# Altium PCB Модуль STM32F108СBT6.PcbDoc
Units mm, origin at the board's own origin, x right, y up, seen from the top; angles counter-clockwise.
Board outline 60 x 40 mm, 2 copper layers (Top Layer, Bottom Layer); 18 components, 43 nets, 182 pads, 31 vias.
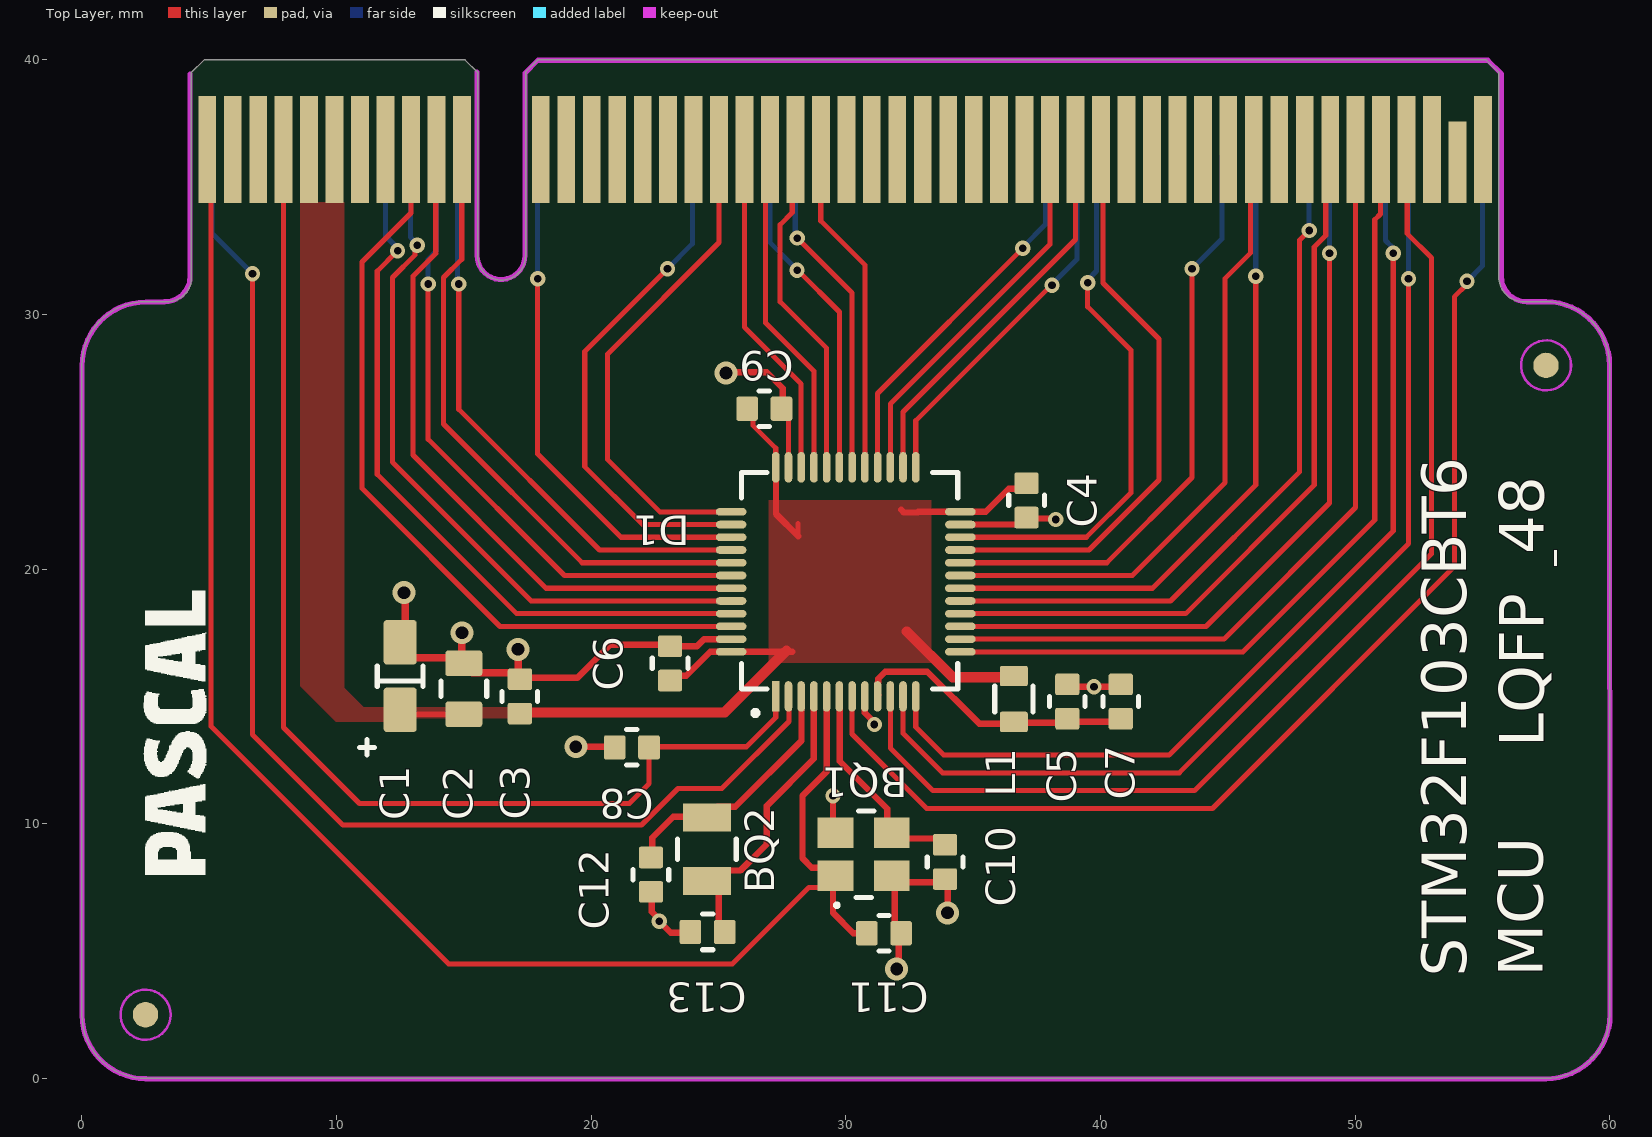
[diagram p0: Top Layer view]
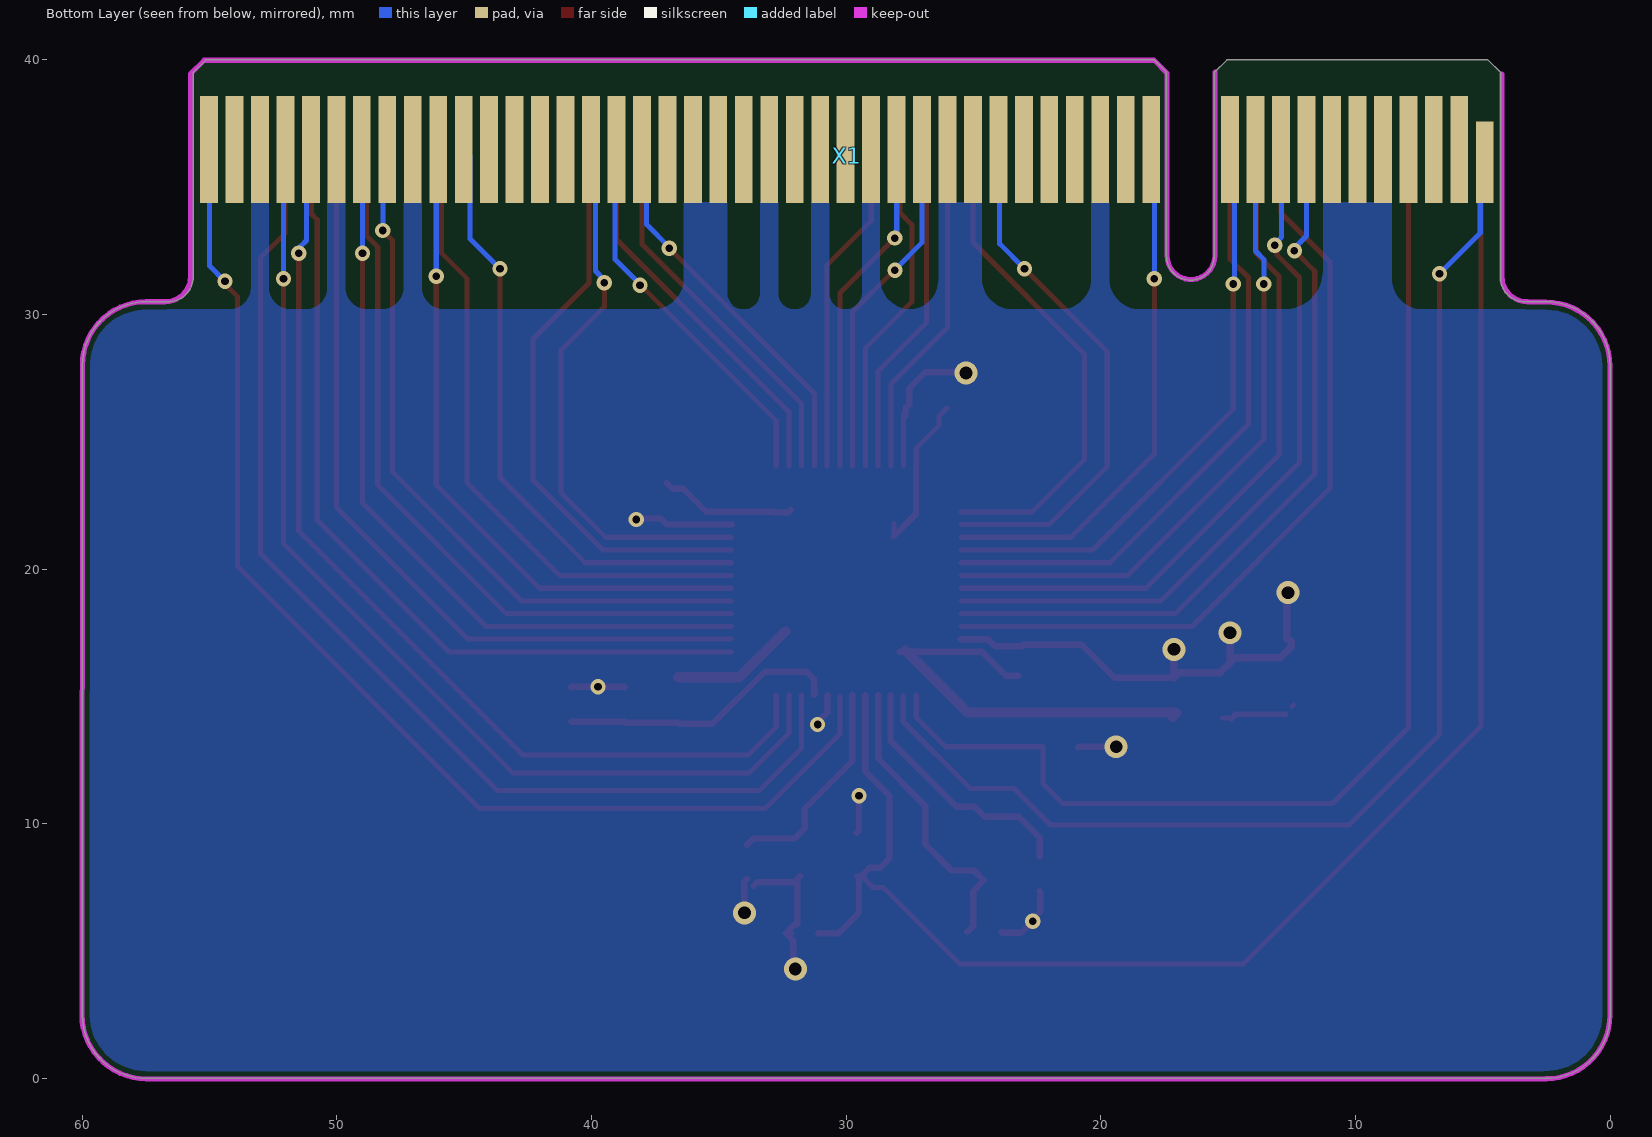
[diagram p1: Bottom Layer view, seen from below]
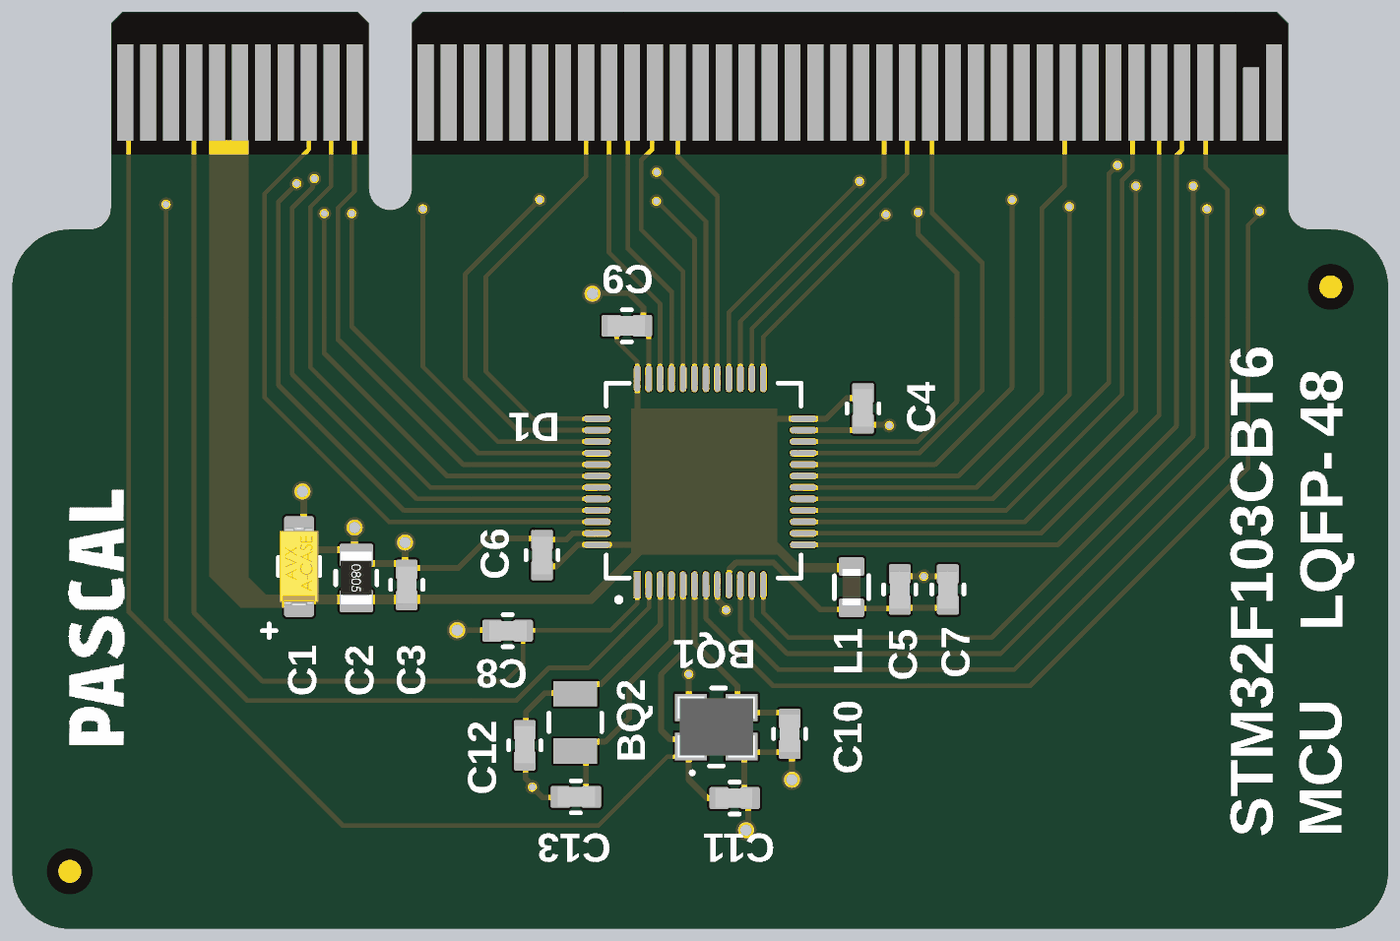
[diagram p2: 3D render of the assembled board from above, using the file's embedded part models]

## Layer stack, top to bottom
Top Solder: solder mask 0.0102, Solder Resist, Dk 3.5
Top Layer: signal copper 0.0356
Dielectric 1: dielectric 0.32, FR-4, Dk 4.8
Bottom Layer: signal copper 0.0356
Bottom Solder: solder mask 0.0102, Solder Resist, Dk 3.5

## Board outline
15.05,40 15.55,39.5 15.55,32.275 ccw(c16.475,32.275) 16.475,31.35 ccw(c16.475,32.3) 17.425,32.3 17.425,39.525 17.9,40 55.15,40 55.65,39.5 55.65,31.475 ccw(c56.625,31.475) 56.625,30.5 57.5,30.5 cw(c57.5,28) 60,28 60,2.5 cw(c57.5,2.5) 57.5,0 2.5,0 cw(c2.5,2.5) 0,2.5 0,28 cw(c2.5,28) 2.5,30.5 3.35,30.5 ccw(c3.35,31.45) 4.3,31.45 4.3,39.5 4.8,40

## Design rules (kind name [scope] priority, off if disabled: settings)
BoardOutlineClearance [All] p1: gap=0.25 ignorepadtopadclearanceinfootprint=FALSE
Clearance [All] p1: gap=0.2 ignorepadtopadclearanceinfootprint=FALSE
ComponentClearance [All] p1 off: gap=0.254 collisioncheckmode=3 verticalgap=0.254 showdistances=FALSE
Height [All] p1 off: minheight=0 maxheight=25.4 prefheight=12.7
PolygonConnect [All] p1: connectstyle=Direct reliefconductorwidth=0.254 reliefentries=4 polygonreliefangle="90 Angle" airgapwidth=0.254
RoutingVias [All] p1: holewidth=0.5 width=0.9 viastyle="Through Hole" minholewidth=0.3 minwidth=0.6 maxholewidth=0.711 maxwidth=1.27
SolderMaskExpansion [All] p1: expansion=-0.8 istentingtop=FALSE soldermaskfromhole=TRUE
Width [All] p1: maxlimit=0.5 minlimit=0.2 preferedwidth=0.25 minimp=50.000000 maximp=50.000000 favimp=50.000000
28 further rules are at their usual default settings.

## Components (designator, comment, footprint, x,y, rotation, side; value= is the part's Value field where it differs from the comment)
BQ1 "кварцевый резонатор_1" SMD3225_4P20MHZ20PF10PPM 30.7,8.8 r0 top value="8 МГц"
BQ2 "3215" SMD3215_2P32768KHZ125PF10PPM 24.55,9 r270 top value="32,768 кГц"
C1 "A-case" K53-68_3216(A) 12.5,15.8 r90 top value="10 мк"
C2 "0805" K10-69B_2.0_1.25(0805) 15,15.3 r270 top value="1 мк"
C3 "0603" K10-79_1.6_0.8(0603) 17.2,15 r270 top value="0,1 мк"
C4 "0603" K10-79_1.6_0.8(0603) 37.1,22.7 r90 top value="0,01 мк"
C5 "0603" K10-79_1.6_0.8(0603) 38.7,14.8 r270 top value="0,1 мк"
C6 "0603" K10-79_1.6_0.8(0603) 23.1,16.3 r270 top value="0,01 мк"
C7 "0603" K10-79_1.6_0.8(0603) 40.8,14.8 r270 top value="0,01 мк"
C8 "0603" K10-79_1.6_0.8(0603) 21.6,13 r0 top value="0,01 мк"
C9 "0603" K10-79_1.6_0.8(0603) 26.8,26.3 r180 top value="0,01 мк"
C10 "0603" K10-79_1.6_0.8(0603) 33.9,8.5 r90 top value=30
C11 "0603" K10-79_1.6_0.8(0603) 31.5,5.7 r180 top value=30
C12 "0603" K10-79_1.6_0.8(0603) 22.35,8 r90 top value=15
C13 "0603" K10-79_1.6_0.8(0603) 24.575,5.75 r0 top value=15
D1 "(LQFP-48) Xilinx" LQFP48 30,19.5 r90 top value=STM32F103C8T6
L1 "0603" 742792651 36.6,14.9 r270 top value=TL160808
X1 "KONT_POLE_MEZ" 3113-112t_otv 31.024,35.975 r180 bottom

## Footprints (in the part's own frame and the unit in brackets; to place one, negate y for a bottom-side part, rotate by r counter-clockwise, add the part's x,y. Pads: shape width x height; smd on the part's side, far side on the other; paste and mask are expansions set on the pad)
3113-112t_otv [mm]
  rect 0.7x3.2 smd: A1(26.1,0)
  rect 0.7x4.2 smd: A2(25.1,0.5) A3(24.1,0.5) A4(23.1,0.5) A5(22.1,0.5) A6(21.1,0.5) A7(20.1,0.5) A8(19.1,0.5) A9(18.1,0.5) A10(17.1,0.5) A11(16.1,0.5) A12(13,0.5) A13(12,0.5) A14(11,0.5) A15(10,0.5) A16(9,0.5) A17(8,0.5) A18(7,0.5) A19(6,0.5) A20(5,0.5) A21(4,0.5) A22(3,0.5) A23(2,0.5) A24(1,0.5) A25(0,0.5) A26(-1,0.5) A27(-2,0.5) A28(-3,0.5) A29(-4,0.5) A30(-5,0.5) A31(-6,0.5) A32(-7,0.5) A33(-8,0.5) A34(-9,0.5) A35(-10,0.5) A36(-11,0.5) A37(-12,0.5) A38(-13,0.5) A39(-14,0.5) A40(-15,0.5) A41(-16,0.5) A42(-17,0.5) A43(-18,0.5) A44(-19,0.5) A45(-20,0.5) A46(-21,0.5) A47(-22,0.5) A48(-23,0.5) A49(-24,0.5)
  rect 0.7x4.2 smd far side: B1(26.1,0.5) B2(25.1,0.5) B3(24.1,0.5) B4(23.1,0.5) B5(22.1,0.5) B6(21.1,0.5) B7(20.1,0.5) B8(19.1,0.5) B9(18.1,0.5) B10(17.1,0.5) B11(16.1,0.5) B12(13,0.5) B13(12,0.5) B14(11,0.5) B15(10,0.5) B16(9,0.5) B17(8,0.5) B18(7,0.5) B19(6,0.5) B20(5,0.5) B21(4,0.5) B22(3,0.5) B23(2,0.5) B24(1,0.5) B25(0,0.5) B26(-1,0.5) B27(-2,0.5) B28(-3,0.5) B29(-4,0.5) B30(-5,0.5) B31(-6,0.5) B32(-7,0.5) B33(-8,0.5) B34(-9,0.5) B35(-10,0.5) B36(-11,0.5) B37(-12,0.5) B38(-13,0.5) B39(-14,0.5) B40(-15,0.5) B41(-16,0.5) B42(-17,0.5) B43(-18,0.5) B44(-19,0.5) B45(-20,0.5) B46(-21,0.5) B47(-22,0.5) B49(-24,0.5)
  rect 0.7x3.2 smd far side: B48(-23,0)
742792651 [mm]
  rrect20% 0.8x1.1 smd mask+0.1: 1(-0.9,0)
  rrect20% 0.8x1.1 smd mask+0.102: 2(0.9,0)
  silkscreen extent -0.5,-0.75 0.5,0.75, body extent -0.8,-0.4 0.8,0.4, height 0.78
K10-69B_2.0_1.25(0805) [mm]
  rrect20% 1x1.45 smd mask+0.1: 1(-1,0) 2(1,0)
  silkscreen extent -0.3,-0.9 0.3,0.9, body extent -1.15,-0.67 1.15,0.68, height 0.76
K10-79_1.6_0.8(0603) [mm]
  rrect20% 0.85x0.95 smd mask+0.1: 1(-0.675,0) 2(0.675,0)
  silkscreen extent -0.2,-0.7 0.2,0.7, body extent -0.8,-0.42 0.84,0.43, height 0.41
K53-68_3216(A) [mm] "Molded Capacitor, 2-Leads, Body 3,20x1,60mm, IPC Medium Density"
  rrect20% 1.75x1.3 smd mask+0.1: 1(-1.325,0) 2(1.325,0)
  silkscreen extent -3.1,-0.9 0.4,1.6, body extent -1.7,-0.84 1.7,0.84, height 1.71
LQFP48 [mm]
  rect 1.2x0.3 smd paste-0.025 mask+0.05: 1(-4.5,2.75)
  oval 1.2x0.3 smd paste-0.025 mask+0.05: 2(-4.5,2.25) 3(-4.5,1.75) 4(-4.5,1.25) 5(-4.5,0.75) 6(-4.5,0.25) 7(-4.5,-0.25) 8(-4.5,-0.75) 9(-4.5,-1.25) 10(-4.5,-1.75) 11(-4.5,-2.25) 12(-4.5,-2.75) 25(4.5,-2.75) 26(4.5,-2.25) 27(4.5,-1.75) 28(4.5,-1.25) 29(4.5,-0.75) 30(4.5,-0.25) 31(4.5,0.25) 32(4.5,0.75) 33(4.5,1.25) 34(4.5,1.75) 35(4.5,2.25) 36(4.5,2.75)
  oval 0.3x1.2 smd paste-0.025 mask+0.05: 13(-2.75,-4.5) 14(-2.25,-4.5) 15(-1.75,-4.5) 16(-1.25,-4.5) 17(-0.75,-4.5) 18(-0.25,-4.5) 19(0.25,-4.5) 20(0.75,-4.5) 21(1.25,-4.5) 22(1.75,-4.5) 23(2.25,-4.5) 24(2.75,-4.5) 37(2.75,4.5) 38(2.25,4.5) 39(1.75,4.5) 40(1.25,4.5) 41(0.75,4.5) 42(0.25,4.5) 43(-0.25,4.5) 44(-0.75,4.5) 45(-1.25,4.5) 46(-1.75,4.5) 47(-2.25,4.5) 48(-2.75,4.5)
  silkscreen extent -5.25,3.45 -5.05,3.65, body extent -3.2,-3.15 3.2,3.25, height 1.6
SMD3215_2P32768KHZ125PF10PPM [mm]
  rect 1.1x1.9 smd mask+0.102: 1(-1.25,0) 2(1.25,0)
  silkscreen extent -0.4,-1.15 0.4,1.15
SMD3225_4P20MHZ20PF10PPM [mm]
  rect 1.4x1.2 smd mask+0.102: 1(-1.1,-0.85) 2(1.1,-0.85) 3(1.1,0.85) 4(-1.1,0.85)
  silkscreen extent -1.1,-2.05 -1,-1.95, body extent -1.68,-1.33 1.68,1.33, height 0.9

## Part data
BQ1: Package=0705, PartNumber=MQ-12.000-18, Company=Mercury
BQ2: library part "кварцевый резонатор", PartNumber="32,768 кГц 3215 SMD", Company=Mercury, Package=3215
C1: library part C+, Package=A-case
C2 C3 C4 C5 C6 C7 C8 C9 C10 C11 C12 C13: library part C
  C2: Package=0805
  C3 C4 C5 C6 C7 C8 C9 C10 C11 C12 C13: Package=0603
D1: library part stm32f103c8t6, Package=LQFP-48, Company=Xilinx, PurtNamber=XC6SLX25-2FGG484C
L1: library part SH6028-5R0YLB, CurrentMax=2,4А, PartNumber=TL160808, Company="ABC Electronics Group", Package=0603
X1: library part 3113-112T

## Free pads (board coordinates)
  round 1 smd paste-1 mask+0.5: 1(2.5,2.5) 1(57.5,28)

## Via types
v1: diameter 0.6, hole 0.3, Top Layer to Bottom Layer, 24 vias
v2: diameter 0.9, hole 0.5, Top Layer to Bottom Layer, 7 vias

## Nets (pads, with @x,y where several pads share a name; then routed paths per layer and width w, separated by ;. In a path a pad name is that pad's centre, name@x,y a point inside that pad or via, vN(x,y) a via of type N, cw(c..) or ccw(c..) an arc to the next point about the centre after c; other vN are vias at no path point)
3V3: C1.1 C2.2 C3.2 C4.2 C6.2 C9.2 D1.24 D1.36 D1.48 L1.1 X1.B5 X1.B6 | length 36.2
  Top Layer w0.2: C1.1@12.442,14.658 C1.1@12.5,14.6 ; C1.1@12.725,14.3 C2.2@14.75,14.3 ; C2.2@14.75,14.225 14.875,14.1 14.925,14.15 C2.2@15.225,14.15 ; C9.2@26.05,26.325 26.35,26.025 26.35,25.65 27.25,24.75 D1.36@27.25,24.05 ; 28.133,21.292 28.133,21.792
  Top Layer w0.25: C6.2@23.233,15.808 23.733,15.808 24.675,16.75 D1.48 27.625,16.75 27.9,16.75 ; D1.36@27.26,24.036 27.26,23.083 27.26,22.165 28.133,21.292 ; 32.175,22.325 32.275,22.225 32.825,22.225 32.85,22.25 35.5,22.25 36.4,23.15 36.825,23.15 C4.2@37.05,23.375
  Top Layer w0.4: C3.2@17.025,14.35 C3.2@17.175,14.2 ; C3.2@17.15,14.375 25.25,14.375 27.625,16.75 27.675,16.8 ; 32.397,17.553 34.2,15.75 L1.1@36.6,15.75
BOOT0: D1.44 X1.A9 | length 28.4
  Top Layer w0.2: v1(13.168,32.725) 13.091,32.648 13.091,32.343 12.2,31.451 12.2,24.2 17.65,18.75 D1.44
  Bottom Layer w0.2: X1.A9 12.9,36.451 12.9,33.042 13.168,32.774 v1(13.168,32.725)
BOOT1: D1.20 X1.A39 | length 24
  Top Layer w0.2: D1.20 40.25,20.25 43.6,23.6 v1(43.6,31.8)
  Bottom Layer w0.2: v1(43.6,31.8) 44.774,32.974 44.774,36.225 X1.A39
GND: BQ1.2 BQ1.4 C1.2 C2.1 C3.1 C4.1 C5.1 C6.1 C7.1 C8.1 C9.1 C10.1 C11.1 C12.1 C13.1 D1.8 D1.23 D1.35 D1.47 X1.A5 X1.A6 X1.A7 X1.A14 X1.A19 X1.A20 X1.A23 X1.A25 X1.A27 X1.A29 X1.A30 X1.A41 X1.A44 X1.A47 | length 44.5
  Top Layer w0.2: D1.35@27.759,24.079 C9.1@27.759,26.091
  Top Layer w0.25: C3.1@17.163,15.737 19.463,15.737 20.75,17.025 C6.1@23.075,17.025 ; v2(19.4,13.025) 20.875,13.025 C8.1@20.9,13 ; C12.1@22.4,7.35 22.375,7.325 22.375,6.55 22.675,6.25 v1(22.675,6.175) 23.125,5.725 23.875,5.725 C13.1 ; C6.1 24.156,16.975 24.431,17.25 D1.47 ; v2(25.3,27.7) 25.329,27.729 26.896,27.729 27.521,27.104 27.521,26.454 C9.1@27.65,26.325 ; C9.1@27.675,26.006 C9.1@27.675,26.35 ; v1(29.5,11.1) 29.5,9.75 BQ1.4 ; D1.8@30.727,15.047 30.75,15.024 30.75,14.358 31.125,13.983 v1(31.125,13.9) ; BQ1.2 BQ1.2@31.925,7.825 ; C11.1@31.925,6.05 BQ1.2@31.925,7.825 ; v2(32,4.3) 32.087,4.388 32.087,5.412 C11.1@32.375,5.7 ; C11.1@32.025,6.05 C11.1@32.375,5.7 ; C11.1 C11.1@32.375,5.7 ; C10.1@33.639,7.564 33.504,7.7 32.05,7.7 BQ1.2@31.925,7.825 ; C10.1 34,7.725 v2(34,6.5) ; D1.23 37.05,21.75 37.288,21.987 38.213,21.987 v1(38.25,21.95) ; C5.1@38.7,15.35 38.725,15.375 v1(39.75,15.375) 40.775,15.375 C7.1@40.8,15.35
  Top Layer w0.3: C1.2@12.525,17.175 12.525,16.95 12.95,16.525 14.725,16.525 C2.1@14.925,16.325 ; v2(12.65,19.075) 12.7,19.025 C1.2@12.7,17.275 ; v2(14.925,17.5) C2.1@14.925,16.325 ; v2(17.125,16.85) 17.138,16.837 17.138,15.763 C3.1@17.163,15.737 ; C3.1@17.15,15.725 16.95,15.925 15.325,15.925 C2.1@14.925,16.325
JTCK: D1.37 X1.B19 | length 19.7
  Top Layer w0.2: X1.B19 25.024,32.824 20.65,28.45 20.65,24.3 22.7,22.25 D1.37
JTDI: D1.38 X1.A18 | length 20.9
  Top Layer w0.2: v1(23,31.8) 19.75,28.55 19.75,24.025 22.025,21.75 D1.38
  Bottom Layer w0.2: v1(23,31.8) 23.975,32.775 23.975,36.426 X1.A18
JTDO: D1.39 X1.A12 | length 20.6
  Top Layer w0.2: v1(17.9,31.4) 17.9,24.525 21.175,21.25 D1.39
  Bottom Layer w0.2: v1(17.9,31.4) 17.9,35.9 X1.A12@18.1,36.1
JTMS: D1.34 X1.B20 | length 13.4
  Top Layer w0.2: X1.B20 26.018,36.468 26.018,29.507 28.25,27.275 D1.34@28.25,24.05
MCO: BQ1.1 C11.2 D1.5 X1.B1 | length 64.1
  Top Layer w0.2: X1.B1 5.075,36.324 5.075,13.825 14.4,4.5 25.55,4.5 28.55,7.5 28.95,7.5 29.4,7.95 BQ1.1
  Top Layer w0.25: D1.5@29.25,15.05 D1.5 29.25,12.05 28.3,11.1 28.3,8.641 28.671,8.27 29.08,8.27 29.4,7.95 29.5,7.85 29.5,6.5 30.3,5.7 C11.2 C11.2@31.1,5.7
NetBQ1_3: BQ1.3 C10.2 D1.6 | length 8.6
  Top Layer w0.25: D1.6@29.76,15.064 29.76,12.45 31.625,10.585 31.625,9.825 32.029,9.421 33.654,9.421 C10.2
NetBQ2_1: BQ2.1 C12.2 D1.3 | length 10
  Top Layer w0.25: C12.2@22.4,8.7 22.4,9.45 23.225,10.275 BQ2.1@24.55,10.275 ; BQ2.1 24.965,10.665 25.665,10.665 28.26,13.26 D1.3@28.26,15.05
NetBQ2_2: BQ2.2 C13.2 D1.4 | length 11.8
  Top Layer w0.25: C13.2 25.018,5.982 25.018,7.35 24.593,7.775 24.983,8.165 25.865,8.165 26.9,9.2 26.9,10.7 28.75,12.55 D1.4@28.75,15.05
NetC5_2: C5.2 C7.2 D1.9 L1.2 | length 11.2
  Top Layer w0.25: D1.9@31.273,15.058 31.26,15.071 31.26,15.545 31.275,15.56 31.275,15.697 31.553,15.975 33.2,15.975 35.25,13.925 36.575,13.925 36.6,13.95 36.615,13.965 38.665,13.965 38.7,14 C7.2@40.8,14
nJTRST: D1.40 X1.A11 | length 23.4
  Top Layer w0.2: v1(14.8,31.2) 14.8,26.275 20.325,20.75 D1.40
  Bottom Layer w0.2: v1(14.8,31.2) 14.749,31.251 14.749,36.25 14.974,36.475 X1.A11
nRST: D1.7 X1.A49 | length 47.1
  Top Layer w0.2: D1.7@30.269,14.993 30.25,14.974 30.25,13.526 33.176,10.6 44.4,10.6 53.9,20.1 53.9,30.692 54.4,31.192 v1(54.4,31.3)
  Bottom Layer w0.2: v1(54.4,31.3) 55,31.9 55,36.451 X1.A49
PA0: D1.10 X1.B46 | length 44.2
  Top Layer w0.2: D1.10@31.75,15.05 31.75,12.975 33.425,11.3 43.7,11.3 53,20.6 53,32.225 52.05,33.175 52.05,36.449 X1.B46
PA1: D1.11 X1.A46 | length 41.2
  Top Layer w0.2: D1.11@32.25,15.05 32.25,13.55 33.8,12 43.1,12 52.1,21 v1(52.1,31.4)
  Bottom Layer w0.2: X1.A46 52.1,36.399 v1(52.1,31.4)
PA2: D1.12 X1.A45 | length 39.3
  Top Layer w0.2: D1.12@32.75,15.05 32.75,13.8 33.85,12.7 42.7,12.7 51.5,21.5 v1(51.5,32.4)
  Bottom Layer w0.2: X1.A45 51.2,36.299 51.2,32.908 51.423,32.685 51.423,32.477 v1(51.5,32.4)
PA3: D1.13 X1.B45 | length 33.1
  Top Layer w0.2: D1.13 45.6,16.75 50.775,21.925 50.775,33.725 51,33.95 51,36.451 X1.B45
PA4: D1.14 X1.B44 | length 31.7
  Top Layer w0.2: D1.14 44.85,17.25 50.018,22.418 50.018,36.468 X1.B44
PA5: D1.15 X1.A43 | length 30.4
  Top Layer w0.2: D1.15 44.15,17.75 49,22.6 v1(49,32.4)
  Bottom Layer w0.2: v1(49,32.4) 49,36.451 X1.A43
PA6: D1.16 X1.B43 | length 29.5
  Top Layer w0.2: D1.16 43.35,18.25 48.4,23.3 48.4,32.651 48.849,33.101 48.849,36.25 49.074,36.475 X1.B43
PA7: D1.17 X1.A42 | length 28.5
  Top Layer w0.2: D1.17 42.75,18.75 47.825,23.825 47.825,32.925 v1(48.2,33.3)
  Bottom Layer w0.2: X1.A42 48.074,36.475 47.85,36.251 48.2,35.901 v1(48.2,33.3)
PA8: D1.29 X1.B23 | length 13.1
  Top Layer w0.2: X1.B23 29.018,36.468 29.018,33.682 30.75,31.95 D1.29@30.75,24.05
PA9: D1.30 X1.A22 | length 13.4
  Top Layer w0.2: v1(28.1,33) 30.25,30.85 D1.30@30.25,24.05
  Bottom Layer w0.2: X1.A22 28.018,36.468 28.018,33.082 v1(28.1,33)
PA10: D1.31 X1.A21 | length 13.6
  Top Layer w0.2: v1(28.088,31.738) 28.112,31.738 29.75,30.1 D1.31@29.75,24.05
  Bottom Layer w0.2: X1.A21 27.018,36.468 27.018,32.832 28.088,31.762 v1(28.088,31.738)
PA11: D1.32 X1.B22 | length 13.5
  Top Layer w0.2: X1.B22 28.074,36.475 27.962,36.363 27.9,36.301 27.9,34.002 27.423,33.525 27.423,30.502 29.25,28.675 D1.32@29.25,24.05
PA12: D1.33 X1.B21 | length 13.4
  Top Layer w0.2: X1.B21 27.074,36.475 26.85,36.251 26.85,29.675 28.75,27.775 D1.33@28.75,24.05
PB0: D1.18 X1.A40 | length 26.5
  Top Layer w0.2: D1.18 42.05,19.25 46.1,23.3 v1(46.1,31.5)
  Bottom Layer w0.2: X1.A40 46.1,36.399 v1(46.1,31.5)
PB1: D1.19 X1.B40 | length 25.5
  Top Layer w0.2: D1.19 41.25,19.75 44.9,23.4 44.9,31.42 45.888,32.408 45.888,36.339 X1.B40
PB5: D1.41 X1.B11 | length 24.6
  Top Layer w0.2: X1.B11 14.918,36.468 14.918,32.166 14.2,31.449 14.2,25.7 19.65,20.25 D1.41
PB6: D1.42 X1.A10 | length 25.6
  Top Layer w0.2: v1(13.6,31.2) 13.6,25.1 18.95,19.75 D1.42
  Bottom Layer w0.2: v1(13.6,31.2) 13.6,32.167 13.924,32.491 X1.A10
PB7: D1.43 X1.B10 | length 27
  Top Layer w0.2: X1.B10 13.9,36.451 13.9,32.4 13,31.5 13,24.481 18.231,19.25 D1.43
PB8: D1.45 X1.A8 | length 29.4
  Top Layer w0.2: v1(12.4,32.5) 11.6,31.7 11.6,23.725 17.075,18.25 D1.45
  Bottom Layer w0.2: X1.A8 11.924,33.084 12.4,32.608 v1(12.4,32.5)
PB9: D1.46 X1.B9 | length 30.8
  Top Layer w0.2: X1.B9 12.924,33.99 11,32.066 11,23.175 16.425,17.75 D1.46
PB10: D1.21 X1.B34 | length 22.9
  Top Layer w0.2: D1.21 39.55,20.75 42.3,23.5 42.3,29.04 40.107,31.233 40.107,36.393 X1.B34
PB11: D1.22 X1.A34 | length 21.9
  Top Layer w0.2: D1.22 39.45,21.25 41.2,23 41.2,28.6 39.5,30.3 v1(39.5,31.25)
  Bottom Layer w0.2: v1(39.5,31.25) 39.5,31.358 39.85,31.708 39.85,36.251 40.074,36.475 X1.A34
PB12: D1.25 X1.A33 | length 15.1
  Top Layer w0.2: D1.25@32.75,24.05 32.75,25.826 38.074,31.15 v1(38.1,31.15)
  Bottom Layer w0.2: v1(38.1,31.15) 38.1,31.188 39.074,32.163 39.074,36.425 X1.A33
PB13: D1.26 X1.B33 | length 15.2
  Top Layer w0.2: D1.26@32.25,24.05 32.25,26.175 39.024,32.949 X1.B33
PB14: D1.27 X1.B32 | length 15
  Top Layer w0.2: D1.27@31.75,24.05 31.75,26.488 38.018,32.756 38.018,36.468 X1.B32
PB15: D1.28 X1.A32 | length 15.3
  Top Layer w0.2: D1.28@31.25,24.05 31.25,26.9 v1(36.95,32.6)
  Bottom Layer w0.2: v1(36.95,32.6) 36.95,32.645 37.849,33.544 37.849,36.25 38.074,36.475 X1.A32
PC13: D1.2 X1.A1 | length 48.5
  Top Layer w0.2: v1(6.7,31.6) 6.7,13.5 10.25,9.95 21.975,9.95 23.408,11.383 25.133,11.383 27.769,14.019 D1.2@27.769,15.041
  Bottom Layer w0.2: X1.A1 5.1,35.799 5.1,33.2 v1(6.7,31.6)
VBAT: C8.2 D1.1 X1.B4 | length 46.4
  Top Layer w0.2: X1.B4 7.918,36.468 7.918,13.782 10.9,10.8 21.5,10.8 22.275,11.575 C8.2 22.275,13.025 26.1,13.025 27.25,14.175 D1.1@27.25,15.05
pads on no net: X1.A2 X1.A3 X1.A4 X1.A13 X1.A15 X1.A16 X1.A17 X1.A24 X1.A26 X1.A28 X1.A31 X1.A35 X1.A36 X1.A37 X1.A38 X1.A48 X1.B2 X1.B3 X1.B7 X1.B8 X1.B12 X1.B13 X1.B14 X1.B15 X1.B16 X1.B17 X1.B18 X1.B24 X1.B25 X1.B26 X1.B27 X1.B28 X1.B29 X1.B30 X1.B31 X1.B35 X1.B36 X1.B37 X1.B38 X1.B39 X1.B41 X1.B42 X1.B47 X1.B48 X1.B49

## Polygon pours and split planes (outlines as drawn)
3V3 on Top Layer "3V3_L01_P001" (solid, pour order 1): 26.976,22.7 26.976,16.326 33.351,16.326 33.351,22.7
3V3 on Top Layer "3V3_L01_P003" (solid, remove dead copper, pour order 3): 12.45,14.15 12.45,14 9.975,14 8.575,15.4 8.575,34.4 10.3,34.4 10.3,15.35 11.075,14.575 16.925,14.575 16.925,14.15
GND on Bottom Layer "Bottom Layer-GND" (solid, remove dead copper, pour order 11): 0,0 60.55,0 60.55,30.2 54.225,30.2 cw(c54.225,31.05) 53.375,31.05 53.375,34.425 52.675,34.425 52.675,31.05 cw(c51.825,31.05) 51.825,30.2 51.225,30.2 cw(c51.225,31.05) 50.375,31.05 50.375,34.4 49.675,34.4 49.675,31.05 cw(c48.825,31.05) 48.825,30.2 48.225,30.2 cw(c48.225,31.05) 47.375,31.05 47.375,34.4 46.675,34.4 46.675,31.05 cw(c45.825,31.05) 45.825,30.2 37.575,30.2 cw(c37.575,31.4) 36.375,31.4 36.375,34.4 34.675,34.4 34.675,30.825 cw(c34.056,30.825) 34.113,30.208 cw(c34.025,30.853) 33.375,30.853 33.375,34.4 32.675,34.4 32.675,30.824 cw(c32.051,30.824) 31.999,30.202 cw(c31.998,30.825) 31.375,30.825 31.375,34.4 30.675,34.4 30.675,30.85 cw(c30.025,30.85) 30.025,30.2 cw(c30.025,30.85) 29.375,30.85 29.375,34.4 28.675,34.4 28.675,31.4 cw(c27.476,31.4) 27.476,30.201 cw(c27.525,31.35) 26.375,31.35 26.375,34.4 24.675,34.4 24.675,31.4 cw(c23.475,31.4) 23.475,30.2 21.575,30.2 cw(c21.575,31.4) 20.375,31.4 20.375,34.4 19.675,34.4 19.675,31.4 cw(c18.475,31.4) 18.475,30.2 12.775,30.2 cw(c12.775,31.7) 11.275,31.7 11.275,34.4 8.575,34.4 8.575,31.4 cw(c7.375,31.4) 7.375,30.2 0,30.2

## Keep-outs
Top Layer:
  circle w0.1: c57.5,28 r0.983
  circle w0.1: c2.5,2.5 r0.983
Keep-Out Layer:
  lines w0.2: 0,2.525 0,27.975 ; 0.008,2.486 ccw(c2.508,2.486) 2.508,-0.014 ; 0.011,27.992 cw(c2.511,27.992) 2.511,30.492 3.242,30.492 ; 2.55,-0.017 57.491,-0.017 ccw(c57.491,2.512) 60.02,2.512 60,28 ccw(c57.5,28) 57.5,30.5 56.75,30.5 cw(c56.75,31.5) 55.75,31.5 55.75,39.45 55.217,39.983 54.608,39.983 18.108,39.983 17.908,39.983 17.4,39.475 17.4,32.3 ; 3.25,30.5 ccw(c3.25,31.5) 4.25,31.5 4.25,39.45 ; 15.525,32.3 15.525,39.525 ; 15.525,32.312 ccw(c16.463,32.312) 17.4,32.312

## Silkscreen, mask and mechanical layers (free items; w line width, h text height)
Top Overlay:
  drawing of 16 lines, arcs and shapes, not listed
  text "-" at 56.686,20.85 h3 r270
  text "LQFP  48" at 58.003,13 h3 r90
  text "STM32F103CBT6" at 54.964,4 h3 r90
  text "MCU" at 57.964,4 h3 r90
Mechanical 4 (Mech5):
  lines w0.1: 4.326,31.708 4.326,31.501 cw(c4.325,31.501) 4.325,31.5 cw(c3.325,31.5) 3.325,30.5 3.118,30.5 2.5,30.5 ccw(c2.5,28) 0,28 0,2.5 ccw(c2.5,2.5) 2.5,0 57.5,0 ccw(c57.5,2.5) 60,2.5 60,28 ccw(c57.5,28) 57.5,30.5 56.65,30.5 cw(c56.65,31.5) 55.65,31.5 ; 61.643,60.118 61.643,60.125 ; 112.943,59.982 112.943,60.1